# EAGLE board openx3 (EAGLE 9.5.1)
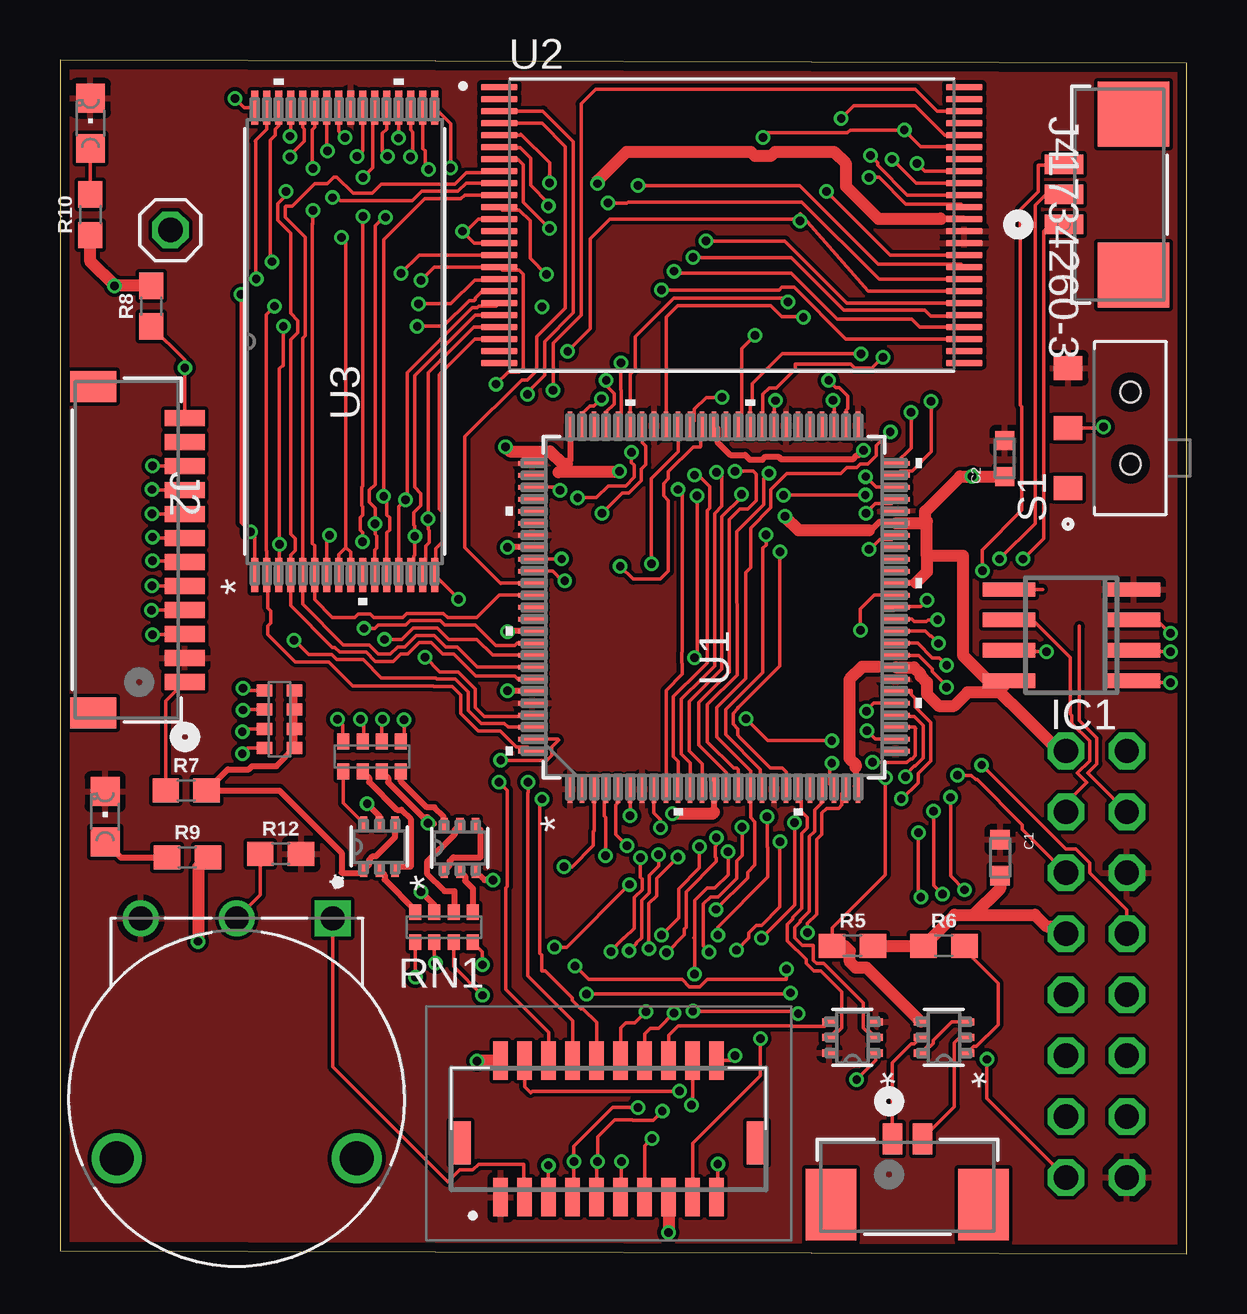
[diagram p0: board, top side]
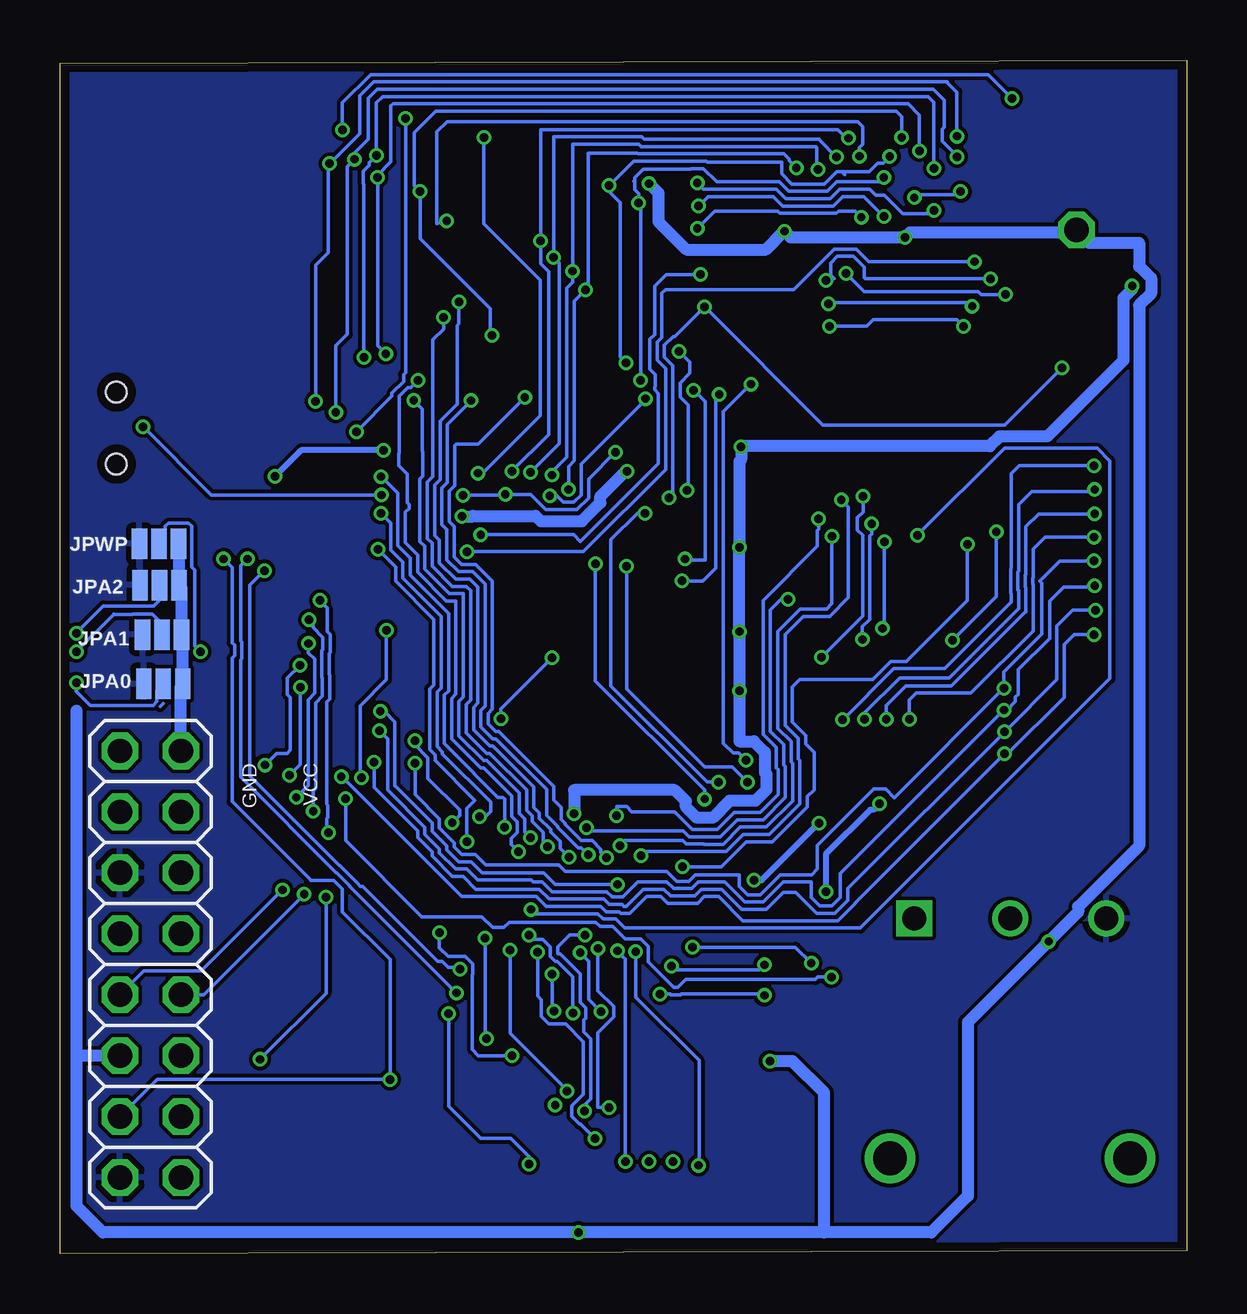
[diagram p1: board, bottom side, seen from below]

Size 46.95 x 49.76 mm. Coordinates in mm from the lower left corner, seen from the top.
Outline: 0,0.13 46.95,0 46.95,49.63 0,49.76 0,0.13
Copper layers (1*16): Top 0.035559375mm / dielectric 1.6mm / Bottom 0.035559375mm
Design rules "oshpark-2layer": minimum track width 6mil, minimum drill 10mil, track to track 6mil, track to pad 6mil, pad to pad 6mil, via to via 6mil, smd to smd 6mil, copper to edge 15mil, drill to drill 6mil, minimum pad ring 5mil, minimum via ring 5mil, stop-mask expansion 2.5mil, vias tented up to drill 0mil, thermal gap 10mil

## Footprints (pad centres in the part's own frame; a part is rotated, then mirrored left to right if it is on the bottom)
WCAP-CSGP_0603_REFLOW = smd 0.8 x 0.8: 1 -0.75,0; 2 0.75,0
SO-08 = smd 0.6 x 2.2: 1 -1.905,-2.6; 2 -0.635,-2.6; 3 0.635,-2.6; 4 1.905,-2.6; 5 1.905,2.6; 6 0.635,2.6; 7 -0.635,2.6; 8 -1.905,2.6
BM20BSRDSGTFLFSN = smd 0.6 x 1.6: 1 -4.5,-2.85; 2 -4.5,2.85; 3 -3.5,-2.85; 4 -3.5,2.85; 5 -2.5,-2.85; 6 -2.5,2.85; 7 -1.5,-2.85; 8 -1.5,2.85; 9 -0.5,-2.85; 10 -0.5,2.85; 11 0.5,-2.85; 12 0.5,2.85; 13 1.5,-2.85; 14 1.5,2.85; 15 2.5,-2.85; 16 2.5,2.85; 17 3.5,-2.85; 18 3.5,2.85; 19 4.5,-2.85; 20 4.5,2.85 | smd 0.85 x 1.8: 21 -6.175,-0.58; 22 6.175,-0.58
CONN_SM12B-SRSS-TB(LF)(SN) = smd 0.66 x 1.651: 1 5.5,-2.421; 2 4.5,-2.421; 3 3.5,-2.421; 4 2.5,-2.421; 5 1.5,-2.421; 6 0.5,-2.421; 7 -0.5,-2.421; 8 -1.5,-2.421; 9 -2.5,-2.421; 10 -3.5,-2.421; 11 -4.5,-2.421; 12 -5.5,-2.421 | smd 1.295 x 1.905: 13 -6.8,-6.236; 14 6.8,-6.236
CON00327_2 = smd 0.813 x 1.295: 1 -0.625,2.001; 2 0.625,2.001 | smd 2.108 x 2.997: 3 -3.175,-0.746; 4 3.175,-0.746
CON3_1X3_DRM125_HPI = smd 0.813 x 1.6: 1 1.25,0; 2 0,0; 3 -1.25,0 | smd 2.718 x 2.997: 4 -3.353,2.896; 5 3.353,2.896
2X08 = drill 1.016 octagon: 1 -8.89,-1.27; 2 -8.89,1.27; 3 -6.35,-1.27; 4 -6.35,1.27; 5 -3.81,-1.27; 6 -3.81,1.27; 7 -1.27,-1.27; 8 -1.27,1.27; 9 1.27,-1.27; 10 1.27,1.27; 11 3.81,-1.27; 12 3.81,1.27; 13 6.35,-1.27; 14 6.35,1.27; 15 8.89,-1.27; 16 8.89,1.27
1X01 = drill 1.016 octagon: 1 0,0
SMT-JUMPER_3_NO_NO-SILK = smd 0.635 x 1.27: 1 -0.813,0; 2 0,0; 3 0.813,0
CHIPLED_0805 = smd 1.2 x 1.2: A 0,-1.05; C 0,1.05
TRANS_UM6J1-L = smd 0.584 x 0.305: 1 -0.965,0.65; 2 -0.965,0; 3 -0.965,-0.65; 4 0.965,-0.65; 5 0.965,0; 6 0.965,0.65
0603 = smd 1.1 x 1: 1 -0.85,0; 2 0.85,0
TRIM_RV100F-30-4K1B-B10K-B301 = drill 1 square: 1 -4,-7.5 | drill 1: 2 0,-7.5; 3 4,-7.5 | drill 1.4: S1 -5,2.5; S2 5,2.5
0603-ARV = smd 0.5 x 0.65: 1 -1.2,-0.625; 2 -0.4,-0.625; 3 0.4,-0.625; 4 1.2,-0.625; 5 1.2,0.625; 6 0.4,0.625; 7 -0.4,0.625; 8 -1.2,0.625
SW_AYZ0102AGRLC = smd 1 x 1.2: 1 -2.5,2.45; 2 0,2.45; 3 2.5,2.45 | hole 0.85: -1.5,-0.15; 1.5,-0.15
TQFP100-L = smd 1.156 x 0.178: 1 -7.576,6; 2 -7.576,5.5; 3 -7.576,5; 4 -7.576,4.5; 5 -7.576,4; 6 -7.576,3.5; 7 -7.576,3; 8 -7.576,2.5; 9 -7.576,2; 10 -7.576,1.5; 11 -7.576,1; 12 -7.576,0.5; 13 -7.576,0; 14 -7.576,-0.5; 15 -7.576,-1; 16 -7.576,-1.5; 17 -7.576,-2; 18 -7.576,-2.5; 19 -7.576,-3; 20 -7.576,-3.5; 21 -7.576,-4; 22 -7.576,-4.5; 23 -7.576,-5; 24 -7.576,-5.5; 25 -7.576,-6; 51 7.576,-6; 52 7.576,-5.5; 53 7.576,-5; 54 7.576,-4.5; 55 7.576,-4; 56 7.576,-3.5; 57 7.576,-3; 58 7.576,-2.5; 59 7.576,-2; 60 7.576,-1.5; 61 7.576,-1; 62 7.576,-0.5; 63 7.576,0; 64 7.576,0.5; 65 7.576,1; 66 7.576,1.5; 67 7.576,2; 68 7.576,2.5; 69 7.576,3; 70 7.576,3.5; 71 7.576,4; 72 7.576,4.5; 73 7.576,5; 74 7.576,5.5; 75 7.576,6 | smd 0.178 x 1.156: 26 -6,-7.576; 27 -5.5,-7.576; 28 -5,-7.576; 29 -4.5,-7.576; 30 -4,-7.576; 31 -3.5,-7.576; 32 -3,-7.576; 33 -2.5,-7.576; 34 -2,-7.576; 35 -1.5,-7.576; 36 -1,-7.576; 37 -0.5,-7.576; 38 0,-7.576; 39 0.5,-7.576; 40 1,-7.576; 41 1.5,-7.576; 42 2,-7.576; 43 2.5,-7.576; 44 3,-7.576; 45 3.5,-7.576; 46 4,-7.576; 47 4.5,-7.576; 48 5,-7.576; 49 5.5,-7.576; 50 6,-7.576; 76 6,7.576; 77 5.5,7.576; 78 5,7.576; 79 4.5,7.576; 80 4,7.576; 81 3.5,7.576; 82 3,7.576; 83 2.5,7.576; 84 2,7.576; 85 1.5,7.576; 86 1,7.576; 87 0.5,7.576; 88 0,7.576; 89 -0.5,7.576; 90 -1,7.576; 91 -1.5,7.576; 92 -2,7.576; 93 -2.5,7.576; 94 -3,7.576; 95 -3.5,7.576; 96 -4,7.576; 97 -4.5,7.576; 98 -5,7.576; 99 -5.5,7.576; 100 -6,7.576
SOP50P2000X120-48N = smd 1.54 x 0.28: 1 -9.69,5.75; 2 -9.69,5.25; 3 -9.69,4.75; 4 -9.69,4.25; 5 -9.69,3.75; 6 -9.69,3.25; 7 -9.69,2.75; 8 -9.69,2.25; 9 -9.69,1.75; 10 -9.69,1.25; 11 -9.69,0.75; 12 -9.69,0.25; 13 -9.69,-0.25; 14 -9.69,-0.75; 15 -9.69,-1.25; 16 -9.69,-1.75; 17 -9.69,-2.25; 18 -9.69,-2.75; 19 -9.69,-3.25; 20 -9.69,-3.75; 21 -9.69,-4.25; 22 -9.69,-4.75; 23 -9.69,-5.25; 24 -9.69,-5.75; 25 9.69,-5.75; 26 9.69,-5.25; 27 9.69,-4.75; 28 9.69,-4.25; 29 9.69,-3.75; 30 9.69,-3.25; 31 9.69,-2.75; 32 9.69,-2.25; 33 9.69,-1.75; 34 9.69,-1.25; 35 9.69,-0.75; 36 9.69,-0.25; 37 9.69,0.25; 38 9.69,0.75; 39 9.69,1.25; 40 9.69,1.75; 41 9.69,2.25; 42 9.69,2.75; 43 9.69,3.25; 44 9.69,3.75; 45 9.69,4.25; 46 9.69,4.75; 47 9.69,5.25; 48 9.69,5.75
TS032 = smd 1.422 x 0.279: 1 -9.741,3.75; 2 -9.741,3.25; 3 -9.741,2.75; 4 -9.741,2.25; 5 -9.741,1.75; 6 -9.741,1.25; 7 -9.741,0.75; 8 -9.741,0.25; 9 -9.741,-0.25; 10 -9.741,-0.75; 11 -9.741,-1.25; 12 -9.741,-1.75; 13 -9.741,-2.25; 14 -9.741,-2.75; 15 -9.741,-3.25; 16 -9.741,-3.75; 17 9.741,-3.75; 18 9.741,-3.25; 19 9.741,-2.75; 20 9.741,-2.25; 21 9.741,-1.75; 22 9.741,-1.25; 23 9.741,-0.75; 24 9.741,-0.25; 25 9.741,0.25; 26 9.741,0.75; 27 9.741,1.25; 28 9.741,1.75; 29 9.741,2.25; 30 9.741,2.75; 31 9.741,3.25; 32 9.741,3.75

## Placement (x,y rotation side)
C1  [WCAP-CSGP_0603_REFLOW]  39.17,16.51 270 top
C2  [WCAP-CSGP_0603_REFLOW]  39.37,33.15 90 top
IC1  24AA256SN  [SO-08]  42.14,25.78 90 top
J1  BM20B-SRDS-G-TF(LF)(SN)  [BM20BSRDSGTFLFSN]  22.86,5.21 0 top
J2  SM12B-SRSS-TB(LF)(SN)  [CONN_SM12B-SRSS-TB(LF)(SN)]  7.62,29.34 270 top
J3  53398-0271  [CON00327_2]  35.31,2.79 0 top
J4  1734260-3  [CON3_1X3_DRM125_HPI]  41.83,44.15 270 top
JP1  [2X08]  43.18,12.06 90 bottom
JP2  [1X01]  4.6,42.67 0 top
JPA0  JUMPER-SMT_3_NO_NO-SILK  [SMT-JUMPER_3_NO_NO-SILK]  42.65,23.75 0 bottom
JPA1  JUMPER-SMT_3_NO_NO-SILK  [SMT-JUMPER_3_NO_NO-SILK]  42.7,25.81 0 bottom
JPA2  JUMPER-SMT_3_NO_NO-SILK  [SMT-JUMPER_3_NO_NO-SILK]  42.8,27.86 0 bottom
JPWP  JUMPER-SMT_3_NO_NO-SILK  [SMT-JUMPER_3_NO_NO-SILK]  42.82,29.59 0 bottom
LED1  [CHIPLED_0805]  1.27,47.12 0 top
LED2  [CHIPLED_0805]  1.88,18.21 0 top
R1  UM6K31NFHATCNTRANS_UM6J1-L  [TRANS_UM6J1-L]  36.83,9.02 180 top
R2  UM6K31NFHATCNTRANS_UM6J1-L  [TRANS_UM6J1-L]  33.02,9.02 180 top
R3  UM6K31NFHATCNTRANS_UM6J1-L  [TRANS_UM6J1-L]  16.66,16.92 90 top
R4  UM6K31NFHATCNTRANS_UM6J1-L  [TRANS_UM6J1-L]  13.31,16.97 90 top
R5  10k  [0603]  33.02,12.83 0 top
R6  10k  [0603]  36.83,12.83 0 top
R7  0  [0603]  5.26,19.3 0 top
R8  10k  [0603]  3.81,39.5 90 top
R9  200  [0603]  5.31,16.51 0 top
R10  200  [0603]  1.27,43.31 90 top
R11  RV100F-30-4K1B-B10K-B301  [TRIM_RV100F-30-4K1B-B10K-B301]  7.37,6.48 180 top
R12  4.7k  [0603]  9.19,16.66 0 top
RN1  10k  [0603-ARV]  16,13.61 0 top
RN2  10k  [0603-ARV]  9.14,22.28 90 top
RN3  100  [0603-ARV]  13,20.73 0 top
S1  AYZ0102AGRLC  [SW_AYZ0102AGRLC]  44.45,34.42 90 top
U1  LC4256V-75TN100CTQFP100-L  [TQFP100-L]  27.25,26.95 90 top
U2  AM29F016D-70EF  [SOP50P2000X120-48N]  27.99,42.88 0 top
U3  AM29F002BB90EI  [TS032]  11.86,38.02 90 top

## Library data of the parts
C1 C2 = Wurth_Elektronik_Passive_Capacitors_rev18b
IC1 = microchip; MPN: 24AA256T-I/SM; OC_FARNELL: 1579570; OC_NEWARK: 08N6838
J1 = BM20B-SRDS-G-TFLFSN; DESCRIPTION: JST SHD, 1mm Pitch, 20 Way, Right Angle PCB Header, Surface Mount; HEIGHT: 5.5mm; MANUFACTURER_NAME: JST (JAPAN SOLDERLESS TERMINALS); MANUFACTURER_PART_NUMBER: BM20B-SRDS-G-TF(LF)(SN)
J2 = SM12B-SRSS-TB; BUILT_BY: EMA_Cory; COPYRIGHT: Copyright (C) 2018 Accelerated Designs. All rights reserved; MANUFACTURER_PART_NUMBER: SM12B-SRSS-TB(LF)(SN); VENDOR: JST
J3 = Molex 2 pos 53398-0271; BUILT_BY: EMA_Don; COPYRIGHT: Copyright (C) 2016 Accelerated Designs. All rights reserved; MANUFACTURER_PART_NUMBER: 53398-0271; VENDOR: Molex Connector Corporation
J4 = TE 3 pos 1734260-3; BUILT_BY: EMA_UL_Team; MANUFACTURER_PART_NUMBER: 1734260-3; VENDOR: TE Connectivity
JP1 JP2 = pinhead
JPA0 JPA1 JPA2 JPWP = SparkFun-Jumpers
LED1 LED2 = adafruit
R1-R4 = UM6K31NFHA; BUILT_BY: EMA_Matt; COPYRIGHT: Copyright (C) 2018 Accelerated Designs. All rights reserved; MANUFACTURER_PART_NUMBER: UM6K31NFHATCN; VENDOR: ROHM Semiconductor
R5 R6 R8 = SparkFun-Resistors; PROD_ID: RES-00824
R7 = SparkFun-Resistors; PROD_ID: RES-08609
R9 R10 = SparkFun-Resistors; PROD_ID: RES-08220
R11 = RV100F-30-4K1B-B10K-B301; AVAILABILITY: Unavailable; DESCRIPTION: Thumbwheel Potentiometers 10mm Linear 10K PC Mount; MF: Alpha Taiwan; MP: RV100F-30-4K1B-B10K-B301; PACKAGE: None; PRICE: None
R12 = SparkFun-Resistors; PROD_ID: RES-07857
RN1-RN3 = resistor-dil; OC_FARNELL: unknown; OC_NEWARK: unknown
S1 = AYZ0102AGRLC; AVAILABILITY: Unavailable; DESCRIPTION: Slide Switch SPDT Surface Mount, Right Angle; MF: C&K; MP: AYZ0102AGRLC; PACKAGE: None; PRICE: None
U1 = LC4256V-75VTN100C; BUILT_BY: EMA_UL_Team; MANUFACTURER_PART_NUMBER: LC4256V-75TN100C; VENDOR: Lattice
U2 = AM29F016D-70EF; AVAILABILITY: Unavailable; DESCRIPTION: NOR Flash Parallel 5V 16M-bit 2M x 8 70ns 48-Pin TSOP; MF: Spansion; MP: AM29F016D-70EF; PACKAGE: TSOP-48 Spansion; PRICE: None
U3 = AM29F002BB-90EI; BUILT_BY: EMA_UL_Team; MANUFACTURER_PART_NUMBER: AM29F002BB90EI; VENDOR: Spansion

## Nets
+3V3: C1.2 C2.1 IC1.8 JP1.9 JP1.15 JPA0.3 JPA1.3 JPA2.3 JPWP.3 R5.2 R6.1 R8.2 R10.1 U1.13 U1.25 U1.33 U1.40 U1.45 U1.63 U1.75 U1.83 U1.90 U1.95
+5V: J1.2 J1.15 JP1.6 JP2.1 R9.2 U2.12 U2.14 U2.37 U3.8 U3.9
A0: U1.14 U2.30 U3.20
A1: U1.11 U2.29 U3.19
A2: U1.10 U2.28 U3.18
A3: U1.9 U2.27 U3.17
A4: U1.8 U2.22 U3.16
A5: U1.6 U2.21 U3.15
A6: U1.5 U2.20 U3.14
A7: U1.4 U2.19 U3.13
A8: U1.3 U2.18 U3.3
A9: U1.100 U2.17 U3.2
A10: U1.99 U2.16 U3.31
A11: U1.98 U2.15 U3.1
A12: U1.97 U2.10 U3.12
A13: U1.94 U2.9 U3.4
A14: U1.93 U2.8 U3.5
A15: U1.92 U2.7 U3.11
A16: U1.91 U2.6 U3.10
A17: U1.87 U2.5 U3.6
A18: U1.86 U2.4
A19: U1.85 U2.3
A20: U1.84 U2.46
BLUELED: J2.8 RN3.7
BUFLCE#: U1.19 U3.30
D0: J4.1 JP1.4 R2.1
DB0: J1.7 U1.70
DB1: J1.8 U1.69
DB2: J1.9 U1.67
DB3: J1.10 U1.66
DB4: J1.11 U1.58
DB5: J1.12 U1.53
DB6: J1.13 U1.48
DB7: J1.14 U1.47
DQ0: U1.78 U2.31 U3.21
DQ1: U1.72 U2.32 U3.22
DQ2: U1.71 U2.33 U3.23
DQ3: U1.61 U2.34 U3.25
DQ4: U1.60 U2.38 U3.26
DQ5: U1.59 U2.39 U3.27
DQ6: U1.50 U2.40 U3.28
DQ7: U1.49 U2.41 U3.29
E: J1.6 U1.64
EPA0: IC1.1 JPA0.2
EPA1: IC1.2 JPA1.2
EPA2: IC1.3 JPA2.2
EPWP: IC1.7 JPWP.2
EXTPROTSW: J2.12 R8.1 S1.2 U1.12
FPEJECT: J3.1 R1.5
FPPWR: J3.2 R1.2
GND: C1.1 C2.2 IC1.4 J1.1 J2.2 JP1.2 JP1.12 JPA0.1 JPA1.1 JPA2.1 JPWP.1 LED1.C LED2.C R2.3 R2.6 R11.3 R12.2 S1.3 U1.1 U1.7 U1.18 U1.26 U1.32 U1.46 U1.51 U1.57 U1.68 U1.76 U1.82 U1.96 U2.35 U2.36 U3.24
HDDACT: J4.2 RN1.3
HDDLED: J2.9 RN3.6
K: J1.16 R2.4
LAD0: JP1.11 U1.34
LAD1: JP1.10 U1.35
LAD2: JP1.8 U1.36
LAD3: JP1.7 U1.37
LANACT: J4.3 RN1.4
LANLED: J2.10 RN3.5
LCLK: JP1.1 U1.38
MNFLCE#: U1.17 U2.11
N$1: LED2.A R9.1
N$2: R3.2 RN1.5
N$3: R3.5 RN1.6
N$4: R3.1 R3.4 R4.1 R4.4 R7.2 RN2.1 RN2.2 RN2.3 RN2.4
N$5: LED1.A R10.2
N$6: R4.5 RN1.7
N$56: R1.3 R1.6
N$59: R1.4 R5.1 U1.39
N$61: R1.1 R6.2 U1.41
N$62: R2.2 U1.22
N$63: R2.5 U1.20
N$71: R4.2 RN1.8
N$72: R3.6 RN3.4
N$73: R3.3 RN3.3
N$74: R4.3 RN3.2
N$75: R4.6 RN3.1
N$78: RN1.1 U1.31
N$79: RN1.2 U1.30
N$87: J2.1 R7.1
OE#: U1.15 U2.43 U3.32
REDLED: J2.7 RN3.8
RS: J1.4 U1.44
RW: J1.5 U1.65
SCL: IC1.6 JP1.13
SDA: IC1.5 JP1.14
SWBANK1: J2.6 RN2.5 U1.23
SWBANK2: J2.5 RN2.6 U1.27
SWBANK3: J2.4 RN2.7 U1.28
SWBANK4: J2.3 RN2.8 U1.29
TCK: J1.20 U1.24
TDI: J1.18 U1.2
TDO: J1.17 U1.74
TMS: J1.19 U1.52
VO: J1.3 R11.1 R11.2 R12.1
WE#: U1.16 U2.44 U3.7

## Tracks (layer width: path | path; a pad name or v marks a point on that pad's centre or on a via)
+3V3  (via drill 0.35)
  Top 0.254: U1.45 34.78,30.5 34.14,30.5 33.8,30.16 33.71,30.16 | U1.13 27.25,18.84 27.25,18.83 27.25,18.41 | U1.83 18.65,29.45 v18.64,29.44 | U1.90 18.66,25.95 v18.64,25.93 | U1.95 18.66,23.45 v18.64,23.47 | U1.75 21.25,33.05 21.13,32.93 20.78,32.57 | U1.63 27.39,34.39 27.39,33.83 27.92,33.3 28.54,33.3 28.74,33.1 29.27,33.1 29.39,33.22 29.94,33.22 30.04,33.12 33.05,33.12 33.2,33.28 33.26,33.28 v33.48,33.49 | 35.66,27.96 34.85,27.96 U1.40 | 34.09,24.46 34.1,24.45 U1.33 35.58,24.44 | 33.15,20.27 33.15,19.48 U1.25 | 38.08,14.12 38.2,14.12
  Top 0.508: R5.2 R6.1 37.28,14.12 38.2,14.12 40.62,14.12 41.1,13.64 41.6,13.64 JP1.9 | C1.2 39.17,15.21 38.08,14.12 | 39.46,23.8 IC1.8 39.06,23.39 37.82,23.39 37.26,22.83 36.61,22.83 36.12,23.32 36.12,23.81 35.86,24.08 35.86,24.16 35.58,24.44 U1.33 | 36.12,29.07 36.12,30.53 36.04,30.45 | 36.04,30.45 36.04,30.94 37.5,32.4 v38,32.4 C2.1 | R8.2 v2.27,40.35 1.27,41.35 R10.1 | v18.57,33.63 18.75,33.45 20.43,33.45 20.94,32.93 21.13,32.93 | U1.45 36.04,30.45 | 27.25,18.41 27.18,18.34 v25.53,18.34 | v23.32,32.61 23.27,32.57 20.78,32.57 | 36.12,29.07 36.13,29.08 37.62,29.08 37.62,24.94 41.61,20.95 JP1.15 41.91,21.24 41.78,21.37 | 36.12,29.07 36.12,28.42 35.66,27.96 | 34.09,24.46 33.43,24.46 32.89,23.93 32.89,20.65 33.15,20.39 33.15,20.27 | 33.71,30.16 30.78,30.16 v30.2,30.73
  Bottom 0.254: v33.48,33.49 36.9,33.49 v38,32.4
  Bottom 0.508: v30.2,30.73 29.76,30.73 29.74,30.75 27.13,30.75 26.91,30.53 25.21,30.53 24.44,31.31 24.44,31.57 23.36,32.65 v23.32,32.61 | v25.53,18.34 25.53,19.33 21.34,19.33 20.87,18.86 20.87,18.63 20.41,18.17 19.76,18.17 19.05,18.88 17.97,18.88 17.51,19.33 17.51,19.98 17.58,20.05 17.58,20.89 18.04,21.35 18.64,21.35 v18.64,23.47 v18.64,25.93 18.67,25.96 18.67,29.41 v18.64,29.44 18.64,33.02 18.57,33.1 v18.57,33.63 18.54,33.66 8.2,33.66 7.79,34.06 5.82,34.06 2.64,37.24 2.64,39.84 2.27,40.2 v2.27,40.35 | JPWP.3 41.99,29.57 JPA2.3 41.89,27.76 JPA1.3 41.83,25.76 JPA0.3 41.91,23.67 JP1.15
+5V  (via drill 0.35)
  Top 0.152: U2.12 17.44,43.12 16.93,42.62 v16.76,42.62 17.26,42.12 U2.14 | v11.73,42.37 11.91,42.19 11.91,29.44 | U3.9 12.11,29.24 11.91,29.44 | U3.8 11.61,29 11.61,29.01 11.61,29.13 11.91,29.44
  Top 0.254: U2.37 37.66,43.15 36.69,43.15
  Top 0.508: 36.69,43.15 36.72,43.12 34.11,43.12 32.75,44.48 32.75,45.43 32.26,45.92 29.79,45.92 29.61,45.75 28.96,45.75 28.79,45.92 23.6,45.92 22.4,44.73 v22.4,44.6 | J1.15 25.36,0.9 v25.35,0.89 | v17.37,8.03 17.4,8.06 J1.2 | R9.2 5.75,16.1 v5.75,13.02
  Bottom 0.508: v22.4,44.6 22.02,44.22 22.02,43.03 20.85,41.86 17.53,41.86 v16.76,42.62 16.51,42.37 v11.73,42.37 11.53,42.57 4.7,42.57 JP2.1 4.06,42.14 1.98,42.14 1.98,41.16 1.49,40.67 1.49,40.02 1.98,39.53 1.98,17 4.53,14.46 4.53,14.24 v5.75,13.02 9.12,9.65 9.12,2.41 10.64,0.89 15.11,0.89 | 15.11,0.89 v25.35,0.89 45.16,0.89 46.25,1.98 46.25,8.25 | 46.25,8.25 46.25,22.63 | JP1.6 46.25,8.25 | 15.11,0.89 15.11,6.71 16.43,8.03 v17.37,8.03
A0  (via drill 0.35)
  Top 0.152: U3.20 14.11,46.51 v14.1,46.5 | U2.30 32.79,39.62 30.2,42.21 v26.92,42.21 | v28.12,32.61 28.88,32.61 29,32.49 29,31.4 28.65,31.04 28.32,31.04 27.89,30.6 27.89,24.24 26.61,22.97 26.61,21.2 27.75,20.06 U1.14
  Bottom 0.152: v14.1,46.5 14.18,46.5 14.54,46.86 26.92,46.86 v26.92,42.21 26.92,41.27 26.59,40.95 26.59,34.14 v28.12,32.61
A1  (via drill 0.35)
  Top 0.152: U3.19 14.61,46.84 14.71,46.75 14.71,45.82 v14.6,45.71 | v26.38,41.52 30.46,41.52 32.66,39.32 36.04,39.32 36.27,39.09 37.65,39.09 U2.29 | v27.35,32.56 27.52,32.73 27.58,32.66 27.58,31.16 27.28,30.86 27.28,24.49 26.79,24.01 26.77,24.01 25.88,23.11 25.88,20.83 26.25,20.46 U1.11
  Bottom 0.152: v14.6,45.71 15.32,46.43 15.32,46.46 22.61,46.46 22.71,46.55 26.38,46.55 v26.38,41.52 26.15,41.29 26.15,33.76 v27.35,32.56
A2  (via drill 0.35)
  Top 0.152: U3.18 15.11,46.06 15.21,45.97 15.21,45.34 v15.36,45.19 | v25.59,40.95 25.59,40.9 25.61,40.88 30.47,40.88 32.38,38.96 35.48,38.96 35.82,38.62 U2.28 | v26.44,32.46 26.59,32.46 27.07,31.98 27.07,31.08 26.97,30.98 26.97,24.62 26.66,24.31 26.65,24.31 25.56,23.22 25.56,20.72 25.75,20.52 U1.10
  Bottom 0.152: v15.36,45.19 15.42,45.24 15.42,46.1 15.47,46.15 22.74,46.15 22.84,46.25 25.59,46.25 v25.59,40.95 25.59,40.5 25.84,40.25 25.84,33.2 26.44,32.61 v26.44,32.46
A3  (via drill 0.35)
  Top 0.152: U3.17 16.27,47.1 v16.27,45.26 | U2.27 32.74,38.12 30.58,40.28 30.08,40.28 29.97,40.17 v25.06,40.17 | U1.9 25.25,23.48 25.93,24.15 25.93,24.6 25.91,24.62 25.91,25.06 25.93,25.08 25.93,31.77 25.86,31.85 v25.76,31.85
  Bottom 0.152: v16.27,45.26 16.57,45.56 16.57,45.62 16.8,45.85 22.86,45.85 22.89,45.87 24.94,45.87 24.94,40.29 v25.06,40.17 25.52,39.71 25.52,33.05 25.76,32.82 v25.76,31.85
A4  (via drill 0.35)
  Top 0.152: U2.22 17.27,38.12 15.8,36.65 15.8,31.03 15.95,30.88 15.95,29.69 15.65,29.39 15.65,28.32 U3.16 v16.61,27.28 | U1.8 24.74,19.36 24.74,18.38 25.02,18.1 v25.02,17.75
  Bottom 0.152: v16.61,27.28 16.89,27.28 17.35,26.82 17.35,21.78 16.79,21.22 16.79,20.38 16.73,20.31 16.73,19.01 17.65,18.09 18.73,18.09 19.44,17.37 19.99,17.37 20,17.38 20.74,17.38 20.98,17.63 24.89,17.63 v25.02,17.75
A5  (via drill 0.35)
  Top 0.152: U3.15 15.24,28.41 15.24,29.5 15.39,29.64 15.39,30.15 15.34,30.19 v15.34,30.63 15.34,36.73 17.24,38.62 U2.21 | v23.75,18.25 U1.6
  Bottom 0.152: v15.34,30.63 15.34,30.19 15.39,30.15 15.39,29.49 17.65,27.23 17.65,21.65 17.1,21.09 17.1,20.25 17.03,20.18 17.03,19.13 17.77,18.39 18.86,18.39 19.56,17.69 20.61,17.69 | 19.86,17.68 19.86,17.69 20.61,17.69 | 21.34,18.41 20.61,17.69 | 21.34,18.41 22.94,18.41 | 20.61,17.69 21.34,18.41 | 21.34,18.41 23.12,18.41 23.34,18.64 23.75,18.64 v23.75,18.26 v23.75,18.25
A6  (via drill 0.35)
  Top 0.152: U3.14 14.74,28.41 14.74,29.09 14.78,29.13 v14.78,29.9 14.78,30.33 14.73,30.38 14.73,30.88 15.04,31.19 15.04,31.69 14.78,31.95 14.78,36.6 17.31,39.12 U2.20 | U1.5 23.25,18.81 23.15,18.71 23.15,17.48 v23.62,17.01
  Bottom 0.152: v14.78,29.9 14.78,27.1 15.01,26.87 16.1,26.87 17.04,25.93 17.04,21.9 16.49,21.35 16.49,20.5 16.42,20.44 16.42,18.88 17.52,17.78 18.6,17.78 19.32,17.07 20.11,17.07 20.12,17.08 20.86,17.08 21,17.22 23.41,17.22 v23.62,17.01
A7  (via drill 0.35)
  Top 0.152: U2.19 18.17,39.49 17.46,39.49 17.39,39.43 17.18,39.43 14.48,36.73 14.48,31.51 v14.4,31.42 14.11,31.14 U3.13 | v22.73,16.59 22.73,18.19 22.68,18.24 22.68,19.3 U1.4
  Bottom 0.152: v22.73,16.59 22.55,16.77 20.25,16.77 20.24,16.76 19.19,16.76 18.48,17.48 17.39,17.48 16.12,18.76 16.12,20.56 16.18,20.63 16.18,21.47 16.74,22.03 16.74,25.81 15.98,26.57 14.88,26.57 14.1,27.36 14.1,31.13 v14.4,31.42
A8  (via drill 0.35)
  Top 0.152: U3.3 9.14,28.31 v9.14,29.57 9.14,36.89 9.28,37.03 9.3,37.03 v9.3,38.65 | U2.18 17.59,40.12 17.3,39.84 17.3,39.77 17.27,39.73 17.05,39.73 15.98,38.66 v14.88,38.66 | U1.3 22.25,17.63 22.23,17.6 22.23,17.02 21.34,16.13 v21.01,16.13
  Bottom 0.152: v9.3,38.65 9.58,38.93 13.06,38.93 13.33,38.66 v14.88,38.66 | v9.14,29.57 9.14,27.23 11.68,24.69 12.33,24.69 13.09,23.93 16.13,23.93 16.43,23.62 16.43,22.15 15.88,21.6 15.88,21.24 15.53,20.89 15.53,19.34 15.81,19.06 15.81,18.63 17.27,17.17 18.35,17.17 19.39,16.13 v21.01,16.13
A9  (via drill 0.35)
  Top 0.152: U1.100 19.5,21.13 19.01,21.13 18.34,21.79 17.43,21.79 16.7,22.52 16.7,23.29 16.34,23.64 15.57,23.64 15.55,23.67 12.2,23.67 11.21,24.67 9.81,24.67 8.66,25.81 8.66,26.17 8.79,26.29 8.79,26.79 8.66,26.92 8.66,28.23 U3.2 8.61,29.29 8.59,29.31 8.59,39.14 v8.94,39.5 | U2.17 18.27,40.59 17.27,40.59 16.28,39.6 v14.93,39.6
  Bottom 0.152: v8.94,39.5 9.09,39.65 14.88,39.65 v14.93,39.6
A10  (via drill 0.35)
  Top 0.152: U3.31 8.61,46.86 8.15,46.41 | 8.15,46.41 8.13,46.38 | 8.15,46.41 8.15,40.66 v8.18,40.64 | v8.18,40.64 8.2,40.62 v8.18,40.64 | v15.04,40.56 15.6,41.12 U2.16 18.43,40.99 19.14,40.99 19.3,40.84 19.3,36.91 19.14,36.76 18.67,36.76 v18.16,36.25 | v18.36,20.57 20.29,20.57 20.48,20.77 20.48,21.12 20.78,21.41 20.74,21.45 U1.99
  Bottom 0.152: v15.04,40.56 14.96,40.64 14.69,40.64 14.84,40.79 14.84,41.29 14.56,41.57 13.9,41.57 13.44,41.12 13.44,40.69 13.4,40.64 v8.18,40.64 | v18.16,36.25 19.3,35.1 19.3,21.27 18.89,20.86 18.66,20.86 v18.36,20.57
A11  (via drill 0.35)
  Top 0.152: U2.15 14.96,41.62 v14.2,40.86 | v7.55,39.98 7.55,30.47 v7.94,30.09 8.11,29.91 U3.1 8.18,28.22 | v9.75,25.58 10.36,24.97 11.33,24.97 11.53,24.77 12.63,24.77 13.4,24 15.65,24 15.7,23.95 16.47,23.95 17,23.41 17,22.65 17.55,22.1 18.52,22.1 18.67,21.95 U1.98
  Bottom 0.152: v7.55,39.98 8.57,39.98 8.69,40.1 13.44,40.1 v14.2,40.86 | v7.94,30.09 7.94,27.39 v9.75,25.58
A12  (via drill 0.35)
  Top 0.152: U2.10 16.85,44.12 16.7,43.97 15.2,43.97 13.49,42.27 v13.49,31.57 | U3.12 13.61,30.05 13.73,30.17 13.73,30.67 13.62,30.79 13.62,31.57 v13.49,31.57 | v13.49,31.57 | v15.21,24.87 15.83,24.25 16.6,24.25 17.31,23.54 17.31,22.77 17.68,22.4 19.63,22.4 U1.97
  Bottom 0.152: v13.49,31.57 13.49,30.92 13.73,30.67 13.73,30.17 13.51,29.95 13.51,26.57 v15.21,24.87
A13  (via drill 0.35)
  Top 0.152: U1.94 19.1,23.95 19.09,23.94 18.95,24.08 17.33,24.08 16.42,24.99 15.95,24.99 15.47,25.47 14.96,25.47 14.48,24.99 14.19,24.99 13.89,24.69 13.13,24.69 12.75,25.07 11.66,25.07 11.46,25.27 11.35,25.27 9.61,27.01 U3.4 9.61,29.12 9.8,29.31 9.8,29.82 9.61,30.01 9.61,38.1 9.91,38.4 9.91,38.9 9.61,39.2 9.61,42.54 9.07,43.08 9.07,43.76 9.42,44.12 v9.42,44.27 | v11.35,44.02 11.56,44.02 11.68,43.89 14.68,43.89 15.07,44.28 16.58,44.28 16.92,44.62 U2.9
  Bottom 0.152: v11.35,44.02 11.23,44.14 9.55,44.14 v9.42,44.27
A14
  Top 0.152: U2.8 18.23,45.06 16.93,45.06 16.45,44.58 13.39,44.58 13,44.2 12.22,44.2 11.54,44.88 11.41,44.88 11.13,44.6 10.61,44.6 9.67,43.66 9.4,43.66 9.38,43.64 9.38,43.21 10.22,42.37 10.22,38.27 10.11,38.17 U3.5 10.11,27.07 11.81,25.38 12.88,25.38 13.26,25 13.76,25 14.07,25.3 14.36,25.3 14.84,25.78 15.59,25.78 16.07,25.3 16.54,25.3 17.39,24.45 U1.93
A15  (via drill 0.35)
  Top 0.152: U1.92 18.03,24.95 17.37,25.6 16.2,25.6 15.72,26.08 14.71,26.08 14.23,25.6 v13.51,25.6 | U3.11 13.11,29.32 13.21,29.42 13.21,29.92 13.13,30 v13.13,30.42 13.13,31.07 12.88,31.32 12.88,31.82 13.13,32.07 13.13,42.84 13.49,43.2 v13.56,43.2 | v20.4,42.73 19.31,43.82 19.31,45.39 19.1,45.59 18.33,45.59 U2.7
  Bottom 0.152: v13.13,30.42 13.13,30 13.21,29.92 13.21,26.44 13.51,26.14 v13.51,25.6 | v13.56,43.2 13.82,43.46 14.51,43.46 14.61,43.37 16.96,43.37 17.05,43.46 19.67,43.46 v20.4,42.73
A16  (via drill 0.35)
  Top 0.152: U2.6 18.32,46.1 19.18,46.1 19.61,45.67 19.61,44.53 20.34,43.8 v20.34,43.67 | v12.6,29.67 12.62,29.69 12.62,30.07 12.52,30.17 12.52,30.67 12.62,30.78 12.62,31.15 12.58,31.19 12.58,31.95 12.62,32 v12.62,43.23 | U1.91 19.04,25.45 18.95,25.35 18.16,25.35 17.3,26.21 16.02,26.21 15.84,26.39 14.58,26.39 14.41,26.21 13.26,26.21 13.11,26.06 v12.67,26.06
  Bottom 0.152: v12.6,29.67 12.6,26.14 v12.67,26.06 | v12.62,43.23 13.46,44.07 14.33,44.07 14.73,43.67 16.83,43.67 17.23,44.07 19.95,44.07 v20.34,43.67
A17  (via drill 0.35)
  Top 0.152: U2.5 19.17,46.62 19.2,46.66 20.4,45.47 v20.4,44.63 | U1.87 18.3,27.45 17.37,26.52 16.15,26.52 15.97,26.69 14.46,26.69 14.28,26.52 13.08,26.52 12.93,26.67 12.42,26.67 12.27,26.52 11.35,26.52 10.61,27.26 U3.6 10.62,29.51 10.52,29.61 10.52,42.93 10.54,42.91 v10.54,43.48
  Bottom 0.152: v10.54,43.48 10.66,43.36 11.84,43.36 12.6,44.12 12.95,44.12 13.21,44.37 14.46,44.37 14.86,43.97 16.7,43.97 17.1,44.37 20.14,44.37 v20.4,44.63
A18
  Top 0.152: U2.4 20.09,47.12 21.06,46.15 21.06,39.42 19.86,38.23 19.86,36.8 19.48,36.42 19.23,36.42 16.87,34.06 16.87,29.44 18.36,27.94 18.37,27.95 U1.86
A19  (via drill 0.35)
  Top 0.152: U2.3 | U2.3 20.12,47.62 21.39,46.35 21.39,39.22 20.19,38.02 20.19,36.63 19.48,35.92 v19.48,35.81 | v21.03,28.05 20.92,28.05 20.52,28.45 U1.85
  Bottom 0.152: v19.48,35.81 19.63,35.66 19.63,28.57 20.16,28.05 v21.03,28.05
A20  (via drill 0.35)
  Top 0.152: U2.46 36.55,47.62 35.64,48.54 22.33,48.54 21.72,47.93 21.72,39.12 20.55,37.95 v20.55,35.99 | v20.9,28.96 U1.84
  Bottom 0.152: v20.55,35.99 20.07,35.51 20.07,28.9 20.85,28.9 v20.9,28.96
BLUELED  (via drill 0.35)
  Top 0.152: J2.8 v3.84,30.84 v3.83,30.84 | RN3.7 12.63,21.38 12.65,21.36 12.65,22.28 v12.52,22.28
  Bottom 0.152: v12.52,22.28 12.52,22.86 11.71,23.67 9.8,23.67 6.73,26.75 6.71,26.75 6.71,27.76 6.73,27.79 6.73,28.29 6.71,28.32 6.71,30.3 6.17,30.84 v3.83,30.84
BUFLCE#  (via drill 0.35)
  Top 0.152: U3.30 9.11,47.02 8.97,46.88 8.97,46.62 8.77,46.41 8.77,41.42 v8.84,41.35 | U1.19 30.25,20.09 30.1,20.24 29.59,20.24 28.32,21.51 28.25,21.63 28.25,21.88 28.04,22.08 28.04,22.52 28.25,22.72 28.25,22.76 30,24.51 v30,29.26
  Bottom 0.152: v30,29.26 25.15,29.26 21.72,32.69 21.72,36.89 22.07,37.24 22.07,37.99 21.87,38.19 21.87,40.03 21.72,40.18 16.38,40.18 14.68,41.88 13.78,41.88 13.25,41.35 v8.84,41.35
D0  (via drill 0.35)
  Top 0.152: J4.1 41.27,42.89 41,42.62 41,29.82 v40.13,28.96 | R2.1 33.99,8.05 v33.2,7.26
  Bottom 0.152: v40.13,28.96 39.78,28.6 39.78,25.46 39.68,25.37 39.68,24.93 39.78,24.83 39.78,18.85 36.52,15.59 | JP1.4 42.9,7.26 v33.2,7.26 33.2,12.27 35.18,14.25 35.18,15.21 35.54,15.57 36.5,15.57 36.52,15.59 | 36.52,15.59
DB0  (via drill 0.35)
  Top 0.152: U1.70 23.75,36.66 23.97,36.88 23.97,38.23 25.57,39.83 30.18,39.83 v30.33,39.67 | J1.7 21.41,2.41 v21.41,3.83 21.41,4.47 23.04,6.1 v24.08,6.1 | v25.74,16.52 24.86,15.65 24.86,14.92 24.54,14.59 v24.54,12.72
  Bottom 0.152: v30.33,39.67 30.33,38.76 30.4,38.69 30.4,35.41 31.11,34.7 31.11,32.27 31.34,32.04 31.34,29.94 31.14,29.74 31.14,28.79 30.47,28.12 29.88,28.12 29.54,27.78 29.54,22.95 29.71,22.77 29.71,21.83 29.05,21.16 28.91,21.16 27.2,19.45 27.2,18.6 26.98,18.38 26.98,18.15 26.51,17.68 26.51,17.58 26.11,17.19 26.11,16.9 v25.74,16.52 | 21.41,3.99 v21.41,3.83 | v24.08,6.1 24.54,6.1 24.54,9.21 23.88,9.86 23.88,10.3 24.54,10.96 v24.54,12.72
DB1  (via drill 0.35)
  Top 0.152: J1.8 21.36,9.7 19.48,11.59 19.48,19.2 19.51,19.23 v19.51,19.66 | U1.69 24.25,33.82 24.41,33.66 24.41,32.89 24.23,32.71 24.23,32.24 23.7,31.7 23.42,31.7 v22.58,30.86
  Bottom 0.152: v22.58,30.86 22.91,30.86 24,29.77 24,23.67 19.99,19.66 v19.51,19.66
DB2  (via drill 0.35)
  Top 0.152: U1.67 25.25,39.05 25.73,39.52 29.62,39.52 30.08,39.07 30.93,39.07 v30.97,39.03 | J1.9 22.36,3.79 v22.4,3.83 22.4,4.88 23.11,5.59 23.84,5.59 23.86,5.57 24.72,5.57 v25.09,5.94 | v26.64,16.97 26.64,16.08 25.78,15.22 25.78,14 v25.07,13.28
  Bottom 0.152: v30.97,39.03 30.97,38.55 31.42,38.1 31.42,32.39 31.65,32.16 31.65,29.82 31.44,29.61 31.44,28.66 30.6,27.82 30.02,27.82 29.84,27.64 29.84,23.07 30.02,22.9 30.02,21.7 29.17,20.86 29.04,20.86 27.51,19.33 27.51,18.48 27.28,18.25 27.28,18.02 26.81,17.56 26.81,17.14 v26.64,16.97 | v25.09,5.94 25.12,5.97 25.12,6.17 24.84,6.45 24.84,8.96 25.12,9.24 25.12,9.74 25.05,9.81 25.05,10.25 25.27,10.48 25.27,11.67 26.09,12.49 26.18,12.49 26.21,12.52 26.21,12.78 25.71,13.28 v25.07,13.28
DB3  (via drill 0.35)
  Top 0.152: J1.10 22.36,9.64 21.79,10.21 21.69,10.21 21.34,10.57 21.34,10.67 20.22,11.79 20.07,11.79 20.07,12.45 19.99,12.53 19.99,18.86 v20.09,18.95 | v24.64,28.75 24.64,32.31 25.75,33.42 U1.66
  Bottom 0.152: v20.09,18.95 20.09,19.32 24.64,23.88 v24.64,28.75 24.59,28.8
DB4  (via drill 0.35)
  Top 0.152: U1.58 29.75,35.42 29.82,35.48 v29.82,35.56 | v24.94,16.64 24.94,16.15 24.56,15.78 24.56,15.05 24.23,14.72 24.23,13.17 24.01,12.95 24.01,12.91 v23.72,12.62 | v23.39,3.83 23.39,2.39 J1.11
  Bottom 0.152: v29.82,35.56 30.81,34.57 30.81,32.14 31.04,31.91 31.04,30.39 30.83,30.18 30.83,28.91 30.34,28.42 29.75,28.42 29.23,27.91 29.23,22.82 29.41,22.65 29.41,21.95 28.92,21.47 28.79,21.47 26.67,19.35 26.67,18.28 26.2,17.81 26.2,17.76 25.36,16.92 25.22,16.92 v24.94,16.64 | v23.72,12.62 23.49,12.4 23.49,12.38 23.39,12.28 v23.39,3.83
DB5  (via drill 0.35)
  Top 0.152: U1.53 32.25,35.52 v32.21,35.56 | v24.41,10.08 23.95,9.63 23.57,9.63 23.36,9.42 J1.12 | v27.34,17.34 27.34,17.02 27.31,16.98 27.31,16.54 27.34,16.51 27.34,16.35 26.09,15.09 26.09,13.61 26.01,13.53 26.01,13.29 v25.27,12.55
  Bottom 0.152: v32.21,35.56 31.85,35.2 31.85,33.47 31.83,33.44 31.83,32.41 31.95,32.29 31.95,29.69 31.75,29.49 31.75,28.54 30.72,27.51 30.15,27.51 30.15,23.2 30.32,23.03 30.32,21.58 29.3,20.55 29.16,20.55 27.81,19.2 27.81,18.35 27.59,18.13 27.59,17.58 v27.34,17.34 | v25.27,12.55 24.92,12.19 24.92,10.59 v24.41,10.08
DB6  (via drill 0.35)
  Top 0.152: U1.48 34.01,31.95 v33.57,32.39 | v28.42,17.78 28.42,16.59 28.2,16.37 28.2,15.65 27.43,14.88 27.11,14.88 26.8,14.57 26.8,13.04 26.8,12.83 v27.05,12.57 | v24.66,4.8 24.36,4.5 J1.13
  Bottom 0.152: v33.57,32.39 32.87,31.7 32.87,29.52 32.36,29 32.36,28.28 30.76,26.69 30.76,23.45 30.93,23.28 30.93,21.27 30.71,21.05 30.71,21.04 28.7,19.02 28.5,19.02 28.42,18.95 v28.42,17.78 | v24.66,4.8 25.28,5.41 25.32,5.41 25.63,5.72 25.63,6.16 25.15,6.64 25.15,8.84 25.88,9.58 26.59,9.58 26.9,9.89 26.9,10.59 27.05,10.74 v27.05,12.57
DB7  (via drill 0.35)
  Top 0.152: U1.47 34.65,31.27 33.97,31.27 33.62,30.91 | 33.62,30.91 33.58,30.91 | 33.62,30.91 v33.58,30.87 | v27.41,13.28 v27.4,13.29 27.4,13.61 29.49,15.7 29.49,16.93 29.47,16.95 29.47,18.11 29.46,18.11 v29.46,18.21 | v25.58,10.03 24.94,9.4 24.59,9.4 24.36,9.17 J1.14
  Bottom 0.152: v33.58,30.87 33.18,30.46 33.18,29.34 32.66,28.83 32.66,28.16 31.06,26.56 31.06,23.58 31.24,23.4 31.24,21.14 31.02,20.92 31.02,20.83 29.01,18.82 29.01,18.44 29.23,18.21 v29.46,18.21 | v27.41,13.28 27.23,13.1 26.83,13.1 26.52,12.79 26.52,12.4 26.31,12.19 26.22,12.19 25.58,11.54 v25.58,10.03
DQ0  (via drill 0.35)
  Top 0.152: U3.21 13.61,46.88 13.43,46.7 13.43,45.95 v13.64,45.74 | U2.31 34.04,40.12 34.04,40.13 33.68,40.13 30.84,43.36 v30.84,43.05 30.76,43.13 22.91,43.13 22.1,42.32 22.1,38.56 v21.16,37.62 | v20.83,31.83 20.7,31.95 19.8,31.95 U1.78
  Bottom 0.152: v13.64,45.74 13.64,46.1 13.49,46.25 13.49,46.97 13.72,47.19 30.81,47.19 31.24,46.76 31.24,42.93 v30.84,43.05 | v21.16,37.62 20.7,37.16 20.7,36.7 21.11,36.29 21.11,35.7 20.78,35.36 20.78,31.88 v20.83,31.83
DQ1  (via drill 0.35)
  Top 0.152: U3.22 13.04,47.69 13.04,45.26 v12.63,44.85 | U2.32 34.13,40.62 30.91,43.84 23.67,43.84 23.62,43.79 v22.84,43.79 v22.84,43.8 | U1.72 22.76,35.09 23.09,35.42 23.09,35.86 22.76,36.19 v22.76,36.4
  Bottom 0.152: v22.76,36.4 22.76,43.72 v22.84,43.8 22.84,44.18 23.01,44.35 23.01,44.68 23.04,44.7 23.01,44.73 23.01,44.85 22.65,45.21 20.67,45.21 20.65,45.23 20.14,45.23 19.59,44.68 16.98,44.68 16.58,44.28 14.98,44.28 14.59,44.68 12.8,44.68 v12.63,44.85
DQ2  (via drill 0.35)
  Top 0.152: U3.23 12.61,45.97 v12.38,45.74 | U2.33 37.55,41.26 34.1,41.26 30.83,44.53 v24.08,44.53 | v23.37,37.13 23.37,36.01 23.39,35.99 23.39,34.66 U1.71
  Bottom 0.152: v23.37,37.13 23.6,37.36 23.6,43.81 24.08,44.3 v24.08,44.53 24.05,44.53 23.04,45.54 20.02,45.54 19.97,45.49 16.88,45.49 16.88,45.01 16.45,44.58 15.11,44.58 14.59,45.11 14.37,45.11 | 14.37,45.11 14.25,44.98 | v12.38,45.74 12.65,45.46 12.88,45.46 13.23,45.11 14.37,45.11
DQ3  (via drill 0.35)
  Top 0.152: U3.25 11.61,46.79 v11.88,46.52 | v31.95,44.27 34.59,41.62 U2.34 | v28.96,38.28 28.4,37.72 28.4,34.67 U1.61
  Bottom 0.152: v11.88,46.52 11.88,47.39 12.12,47.62 31.29,47.62 32.18,46.74 32.18,44.51 v31.95,44.27 31.95,42.31 29.03,39.39 29.03,38.35 v28.96,38.28
DQ4  (via drill 0.35)
  Top 0.152: U2.38 37.55,43.76 35.25,43.76 34.14,44.86 v33.72,44.86 | v11.14,45.97 11.11,46 U3.26 | U1.60 28.75,35.41 28.85,35.51 28.85,36.27 30.1,37.52 v33.38,37.52
  Bottom 0.152: v11.14,45.97 11.14,47.46 11.61,47.93 33.07,47.93 33.16,47.84 33.16,45.52 33.72,44.96 v33.72,44.86 33.72,37.86 v33.38,37.52
DQ5  (via drill 0.35)
  Top 0.152: U3.27 10.61,46.95 10.51,46.85 10.51,45.26 v10.54,45.24 | v33.77,45.77 34.07,45.47 34.07,45.37 35.31,44.12 U2.39 | U1.59 29.29,34.56 29.29,35.83 29.55,36.09 29.84,36.09 30.63,36.88 30.63,37.08 32.95,37.08 33.12,36.91 33.83,36.91 v34.28,37.36
  Bottom 0.152: v10.54,45.24 10.54,48 10.77,48.23 33.5,48.23 33.77,47.97 v33.77,45.77 34.07,45.47 34.07,45.37 34.32,45.11 34.32,44.61 34.28,44.57 v34.28,37.36
DQ6  (via drill 0.35)
  Top 0.152: U2.40 35.67,44.62 v34.67,45.62 | U3.28 10.11,46.96 10.19,46.88 10.19,46.38 9.58,45.77 v9.58,45.72 | U1.50 35.46,33.58 v35.46,35.08
  Bottom 0.152: v9.58,45.72 9.58,45.77 10.19,46.38 10.19,46.88 10.11,46.96 10.11,48.08 10.57,48.54 33.73,48.54 34.12,48.16 34.12,46.46 34.67,45.9 v34.67,45.62 34.98,45.32 34.98,38.33 35.46,37.85 v35.46,35.08
DQ7  (via drill 0.35)
  Top 0.152: U3.29 9.61,46.61 v9.58,46.58 | v35.71,45.44 36.03,45.12 U2.41 | U1.49 35.01,32.63 35.5,32.63 36.3,33.43 v36.3,35.53
  Bottom 0.152: v9.58,46.58 9.58,48.42 9.98,48.82 9.98,48.84 33.88,48.84 34.47,48.26 34.47,46.68 v35.71,45.44 35.76,45.39 35.76,41.73 36.3,41.2 v36.3,35.53
E  (via drill 0.35)
  Top 0.152: U1.64 26.7,34.47 26.7,33.66 26.67,33.63 26.39,33.63 25.35,32.59 25.35,32.31 25.15,32.1 25.15,31.6 25.35,31.4 25.35,28.45 25.02,28.12 23.88,28.12 v23.34,28.65 | J1.6 20.36,9.22 18.58,11.01 18.58,15.26 18.64,15.32 18.64,19.32 v18.3,19.66
  Bottom 0.152: v23.34,28.65 23.34,23.54 20.09,20.29 18.95,20.29 18.62,19.96 18.6,19.96 v18.3,19.66
EPA0  (via drill 0.35)
  Top 0.152: v46.27,23.8 44.82,23.8 IC1.1
  Bottom 0.152: 42.77,22.81 42.65,22.94 | JPA0.2 42.91,23.48 42.91,23.02 43.07,22.86 45.7,22.86 46.27,23.43 v46.27,23.8
EPA1  (via drill 0.35)
  Top 0.152: v46.27,25.09 44.79,25.09 IC1.2
  Bottom 0.152: JPA1.2 42.7,26.34 42.77,26.34 43.1,26.67 43.92,26.67 43.94,26.65 44.71,26.65 | 44.71,26.67 44.71,26.65 | v46.27,25.09 44.71,26.65
EPA2  (via drill 0.35)
  Top 0.152: v46.26,25.86 45.7,26.42 IC1.3
  Bottom 0.152: v46.26,25.86 46.26,25.88 45.14,27 43.05,27 42.8,27.25 JPA2.2
EPWP  (via drill 0.35)
  Top 0.152: v41.1,25.09 39.59,25.09 IC1.7
  Bottom 0.152: 42.63,29.4 JPWP.2 42.56,29.86 42.56,30.32 42.42,30.45 41.6,30.45 41.47,30.32 41.47,28.62 41.34,28.49 41.34,25.34 v41.1,25.09
EXTPROTSW  (via drill 0.35)
  Top 0.152: R8.1 5.2,37.26 v5.2,36.93 J2.12 | v28.4,31.65 28.4,31.55 27.58,30.73 27.58,24.37 26.22,23.01 26.22,20.95 26.75,20.41 U1.12 | v33.55,31.62 30.51,31.62 30.5,31.62 v30.15,31.62 | v43.49,34.47 43.43,34.42 S1.2 | v21.57,31.51 22.34,31.51 22.84,32.01 23.57,32.01 23.92,32.36 23.92,32.87 23.81,32.98 v23.81,33.41
  Bottom 0.152: v30.15,31.62 v30.14,31.62 28.42,31.62 v28.4,31.65 27.34,31.65 26.71,31.02 25.41,31.02 24.92,31.51 24.92,32.3 v23.81,33.41 | v33.55,31.62 40.64,31.62 v43.49,34.47 | v5.2,36.93 7.59,34.54 15.17,34.54 v20.09,39.47 21.33,38.22 21.41,38.22 21.76,37.87 21.76,37.37 21.41,37.02 21.41,31.67 v21.57,31.51
FPEJECT
  Top 0.152: R1.5 35.6,8.75 35.48,8.75 34.68,7.95 J3.1
FPPWR
  Top 0.152: J3.2 37.26,6.13 37.26,8.79 37.49,9.02 R1.2
GND
  pour Bottom: 0,49.66 46.99,49.66 46.99,0.13 0,0.13
  pour Top: 0,49.66 46.99,49.66 46.99,0.13 0,0.13
HDDACT  (via drill 0.35)
  Top 0.152: RN1.3 16.4,11.97 v17.6,10.77 | v21.95,10.82 30.38,10.82 v30.43,10.87 | v39.14,28.96 40.63,30.44 40.63,43.7 41.07,44.14 J4.2
  Bottom 0.152: v17.6,10.77 17.65,10.82 21.06,10.82 21.09,10.8 21.5,10.8 21.52,10.82 v21.95,10.82 | v39.14,28.96 39.42,28.68 39.42,25.54 39.37,25.49 39.37,24.8 39.42,24.75 39.42,19.86 35.43,15.87 35.41,15.87 34.88,15.34 34.88,15.32 v30.43,10.87
HDDLED  (via drill 0.35)
  Top 0.152: J2.9 v3.85,31.84 v3.83,31.85 | v13.43,22.28 13.4,22.25 RN3.6
  Bottom 0.152: v3.83,31.85 3.91,31.77 6.45,31.77 7.01,31.22 7.01,28.45 7.04,28.42 7.04,27.66 7.01,27.64 7.01,26.9 9.91,24 11.96,24 13.43,22.54 v13.43,22.28
K
  Top 0.152: J1.16 25.36,9.1 25.76,9.5 30.51,9.5 30.54,9.48 31.86,9.48 R2.4
LAD0  (via drill 0.35)
  Top 0.152: JP1.11 40.1,17.68 40.1,17.88 38.22,19.76 38.15,19.76 37.98,19.94 v37.39,19.94 | v36.93,23.62 36.93,23.68 36.34,24.28 36.34,24.36 35.78,24.93 34.85,24.93 U1.34
  Bottom 0.152: v37.39,19.94 36.93,20.4 v36.93,23.62
LAD1  (via drill 0.35)
  Top 0.152: v36.95,24.53 36.65,24.83 36.35,24.83 35.73,25.45 U1.35 | 43.83,13.34 JP1.10 44.45,14.33 42.9,15.88 42.9,16.29 42.32,16.87 41.91,16.87 v38.41,20.37
  Bottom 0.152: v38.41,20.37 37.92,20.85 37.49,20.85 37.35,20.99 37.35,23.18 37.49,23.32 37.49,23.99 v36.95,24.53
LAD2  (via drill 0.35)
  Top 0.152: v37.68,15.16 37.1,15.74 v37.1,19.02 | v36.6,25.44 36.3,25.74 36.27,25.74 36.06,25.95 U1.36
  Bottom 0.152: JP1.8 43.46,11.79 41.06,11.79 v37.68,15.16 | v37.1,19.02 36.6,19.52 36.6,23.09 36.33,23.37 36.33,23.87 36.34,23.88 36.34,24.78 36.6,25.04 v36.6,25.44
LAD3  (via drill 0.35)
  Top 0.152: U1.37 35.48,26.45 35.59,26.34 36.09,26.34 36.17,26.42 v36.57,26.42 | v36.4,18.44 36.4,15.36 v36.77,14.99
  Bottom 0.152: v36.57,26.42 36.57,26.34 36.4,26.17 36.4,26.09 36,25.69 36,25.18 36.04,25.14 36.04,24.01 36.02,24 36.02,23.24 36.3,22.96 36.3,19.4 36.4,19.29 v36.4,18.44 | v36.77,14.99 40.97,10.79 JP1.7
LANACT  (via drill 0.35)
  Top 0.152: J4.3 41.8,45.36 40.77,45.36 40.77,44.27 40.03,43.54 40.01,43.51 40.01,35.38 40.08,35.31 40.08,30.99 38.43,29.34 v38.43,28.47 | RN1.4 17.6,12.59 v17.6,12.04 | v30.28,11.86 30.26,11.85 30.26,11.43 26.96,11.43 26.66,11.13 26.22,11.13 25.92,11.43 22.02,11.43 v21.46,11.99
  Bottom 0.152: v38.43,28.47 39.04,27.86 39.04,19.91 35.3,16.18 35.29,16.18 34.57,15.46 34.57,15.45 34.44,15.32 34.34,15.32 31.22,12.19 31.01,12.19 30.77,11.95 30.36,11.95 v30.28,11.86 | v21.46,11.99 21.31,11.84 17.8,11.84 v17.6,12.04
LANLED  (via drill 0.35)
  Top 0.152: J2.10 v3.87,32.84 v3.86,32.84 | v14.34,22.25 14.34,21.49 RN3.5
  Bottom 0.152: v14.34,22.25 12.21,24.38 10.09,24.38 7.31,27.16 7.31,27.51 7.34,27.54 7.34,28.55 7.31,28.57 7.31,32.51 6.98,32.84 v3.86,32.84
LCLK  (via drill 0.35)
  Top 0.152: v36.12,27.23 35.87,26.97 35.16,26.97 35.14,26.95 U1.38 | v35.76,17.55 35.76,14.96 v35.87,14.86 | v38.62,8.1 38.62,6.47 JP1.1
  Bottom 0.152: v35.76,17.55 35.84,17.63 35.84,18.14 35.79,18.19 35.79,18.69 35.84,18.74 35.84,22.99 35.72,23.11 35.72,24.12 35.73,24.14 35.73,25.02 35.69,25.06 35.69,25.81 35.81,25.94 35.81,26.92 v36.12,27.23 | v35.87,14.86 35.87,10.86 v38.62,8.1
MNFLCE#  (via drill 0.35)
  Top 0.152: U2.11 18.43,43.49 19.14,43.49 19.58,43.05 19.58,41.5 v20.27,40.82 | v29.42,29.97 29.42,29.54 29.29,29.41 29.29,24.23 27.74,22.68 27.74,21.64 29.18,20.19 29.18,19.44 U1.17
  Bottom 0.152: v20.27,40.82 21.69,40.82 22.17,40.34 22.17,38.32 22.37,38.12 22.37,36.87 22.15,36.65 22.15,36.15 22.17,36.12 22.17,36.01 22.02,35.86 22.02,32.94 25.27,29.69 25.55,29.97 v29.42,29.97
N$1
  Top 0.254: LED2.A 2.53,16.51 R9.1
N$2
  Top 0.254: R3.2 16.88,15.73 16.88,15.54 17.2,15.22 RN1.5
N$3
  Top 0.254: RN1.6 16.38,14.26 16.43,14.31 16.43,15.11 16.01,15.11 15.29,15.83 15.29,16.32 16.44,17.47 16.44,17.66 R3.5
N$4
  Top 0.254: RN2.4 RN2.3 RN2.2 RN2.1 9.01,20.32 8,20.32 7.87,20.19 6.99,20.19 R7.2 9.14,19.3 11.73,16.71 11.73,15.88 12.53,15.88 R4.1 12.88,16.22 12.88,16.41 13.04,16.57 13.17,16.57 13.96,17.36 R4.4 | R3.1 16.23,16.17 16.23,16.36 16.39,16.52 17.53,16.52 17.53,17.67 R3.4
N$5
  Top 0.152: LED1.A R10.2
N$6  (via drill 0.35)
  Top 0.254: R4.5 13.31,18.25 v12.8,18.75 | v15.04,15.1 15.6,14.53 RN1.7
  Bottom 0.254: v12.8,18.75 13.05,18.5 13.19,18.5 15.04,16.66 v15.04,15.1
N$56
  Top 0.152: R1.3 37.17,9.67 36.39,8.89 36.39,8.77 36.25,8.64 36.13,8.64 R1.6
N$59  (via drill 0.35)
  Top 0.152: U1.39 33.94,27.45 33.93,27.46 33.35,26.87 v33.35,25.98 | v34.39,19.84 34.39,15.8 32.17,13.58 R5.1
  Top 0.508: R5.1 32.7,12.83 32.91,12.62 32.91,12.16 33.15,11.92 33.61,11.92 R1.4
  Bottom 0.152: v33.35,25.98 33.35,23.93 34.44,22.83 34.44,19.89 v34.39,19.84
N$61
  Top 0.152: R1.1 38.06,8.64 38.18,8.64 39.09,9.54 39.09,11.28 37.68,12.69 R6.2
N$62
  Top 0.152: R2.2 33.72,9.29 33.6,9.29 33.46,9.42 33.46,10.45 31.82,12.1 31.52,12.1 31.39,12.23 31.39,12.86 30.92,12.86 30.61,13.17 30.61,13.61 30.84,13.83 30.84,13.89 31.22,14.28 31.22,17.39 31.44,17.61 31.44,18.49 31.75,18.8 U1.22
N$63
  Top 0.152: R2.5 32.32,9.29 32.44,9.29 32.58,9.42 32.58,10.91 31.69,11.79 31.4,11.79 31.09,12.11 31.09,12.26 30.3,13.04 30.3,13.73 30.53,13.96 30.53,14.02 30.91,14.4 30.91,17.51 31.14,17.74 31.14,18.18 30.89,18.43 30.89,19.24 U1.20
N$71
  Top 0.254: R4.2 13.53,15.78 13.53,15.59 14.8,14.32
N$72
  Top 0.254: RN3.4 14.21,19.69 15.29,18.6 15.6,18.6 15.99,18.22 15.99,17.91 R3.6
N$73  (via drill 0.35)
  Top 0.254: RN3.3 13.67,19.83 13.67,19.64 15.12,18.2 15.31,18.2 15.58,17.93 15.35,17.93 v15.33,17.95 | v18.03,15.57 17.69,15.57 R3.3
  Bottom 0.254: v15.33,17.95 17.71,15.57 v18.03,15.57
N$74
  Top 0.254: RN3.2 12.88,19.83 12.88,19.66 14.03,18.5 14.23,18.5 14.61,18.13 14.61,16.13 14.09,16.13 R4.3
N$75
  Top 0.152: RN3.1 11.8,18.79 R4.6
N$78  (via drill 0.35)
  Top 0.152: RN1.1 v14.8,11.54 v14.81,11.53 | v35.05,18.97 35.1,18.97 35.76,19.63 35.76,20.03 36.27,20.54 36.27,22.15 35.64,22.78 35.64,23.13 35.46,23.31 35.46,23.47 35.44,23.45 U1.31
  Bottom 0.152: v14.81,11.53 15.37,11.53 15.47,11.43 20.88,11.43 21.21,11.1 21.37,11.1 22.43,12.16 22.43,12.82 22.74,13.13 23.4,13.13 23.91,13.64 24.45,13.64 24.62,13.82 28.22,13.82 28.45,13.59 28.92,13.59 29.37,14.05 31.88,14.05 35.05,17.22 v35.05,18.97
N$79  (via drill 0.35)
  Top 0.152: U1.30 33.9,22.95 33.58,22.63 v33.6,22.61 | v23.72,15.39 21.11,12.78 v20.6,12.78 | v15.65,12.12 15.6,12.16 RN1.2
  Bottom 0.152: v23.72,15.39 26.31,15.39 26.8,15.88 29.36,15.88 29.82,16.34 30.34,16.34 30.83,16.82 30.83,17 31.44,17.61 31.44,17.95 32.98,19.49 32.99,19.49 32.99,22.17 33.43,22.61 v33.6,22.61 | v20.6,12.78 16.31,12.78 v15.65,12.12
N$87
  Top 0.152: R7.1 4.41,23.05 J2.1
OE#  (via drill 0.35)
  Top 0.152: U3.32 7.68,47.77 v7.29,48.16 | U2.43 37.65,46.15 35.87,46.15 v35.18,46.84 32.92,46.84 32.8,46.72 29.47,46.72 v29.29,46.53 | U1.15 28.25,20.19 28.2,20.24 28.07,20.24 26.97,21.34 26.97,22.88 28.22,24.13 28.2,30.11 29.31,31.22 29.31,32.31 v29.54,32.54
  Bottom 0.152: v7.29,48.16 8.28,49.15 34.01,49.15 35.18,47.98 v35.18,46.84 | v29.29,46.53 29.29,42.93 26.95,40.59 26.95,34.92 29.34,32.54 v29.54,32.54
REDLED  (via drill 0.35)
  Top 0.152: J2.7 3.89,29.84 v3.86,29.87 | RN3.8 11.79,21.37 11.79,22.05 v11.56,22.28
  Bottom 0.152: v3.86,29.87 5.89,29.87 6.4,29.36 6.4,28.19 6.43,28.17 6.43,27.91 6.4,27.89 6.4,25.96 8.99,23.37 11.28,23.37 11.56,23.09 v11.56,22.28
RS  (via drill 0.35)
  Top 0.152: U1.44 34.65,29.77 34.16,29.77 33.75,29.36 v33.71,29.36 | v30,17.17 30,14.45 29.23,13.69 29.02,13.69 28.7,13.38 28.7,13.16 v28.19,12.65 | v25.82,6.77 19.67,6.77 19.61,6.71 19.36,6.95 J1.4
  Bottom 0.152: v33.71,29.36 32.97,28.62 32.97,28.03 31.37,26.43 31.37,23.71 31.54,23.53 31.54,21.02 31.32,20.79 31.32,20.55 29.67,18.9 30,18.57 v30,17.17 | v28.19,12.65 28.19,9.2 25.82,6.82 v25.82,6.77
RW  (via drill 0.35)
  Top 0.152: U1.65 26.44,34.71 26.44,35.2 26.93,35.69 v27.58,35.69 | v20.34,3.68 20.34,2.37 J1.5 | v22.96,12.6 23.19,12.82 23.19,12.84 23.5,13.15 23.52,13.15 23.93,13.56 23.93,14.85 24.25,15.17 24.25,15.61 24.18,15.68 v24.18,16.51
  Bottom 0.152: v27.58,35.69 29.52,33.76 30.43,33.76 30.5,33.68 30.5,32.01 30.73,31.79 30.73,30.51 30.53,30.31 30.53,29.04 30.22,28.73 29.62,28.73 28.93,28.04 28.93,22.7 29.11,22.52 29.11,22.08 28.79,21.77 28.66,21.77 26.37,19.48 26.37,18.92 26.06,18.61 26.06,18.09 25.9,17.94 25.9,17.88 25.24,17.22 24.77,17.22 24.41,16.86 24.41,16.73 v24.18,16.51 | v22.96,12.6 22.96,10.69 20.32,8.05 20.32,3.71 v20.34,3.68
SCL
  Top 0.152: JP1.13 41.91,18.77 42.79,19.65 42.4,20.04 42.9,20.54 42.9,21.36 42.16,22.1 42.16,22.43 42.1,22.49 42.1,24.84 40.53,26.42 IC1.6
SDA
  Top 0.152: 40.95,27.69 IC1.5 | JP1.14 42.83,20.04 43.21,20.42 43.21,21.49 42.47,22.23 42.47,26.16
SWBANK1  (via drill 0.35)
  Top 0.152: J2.6 5.16,28.88 v3.86,28.88 | RN2.5 7.71,23.48 v7.62,23.57 | U1.23 32.07,19.56 32.07,20.53 v32.16,20.44 | v32.16,20.45 v32.16,20.44 | 32.19,20.41 v32.16,20.44
  Bottom 0.152: v3.86,28.88 5.28,28.88 6.12,28.04 6.04,27.96 6.04,25.83 7.62,24.26 v7.62,23.57 12.2,19 12.2,19.01 12.55,19.36 13.05,19.36 15.39,17.02 15.39,16.03 15.62,15.8 16.95,15.8 17.78,14.96 18.29,14.96 18.64,15.32 18.64,15.8 20.48,15.8 20.75,15.52 21.26,15.52 21.66,15.93 25.89,15.93 26.17,16.2 29.21,16.2 29.64,16.64 30.22,16.64 30.53,16.95 30.53,17.13 31.14,17.74 31.14,18.13 32.16,19.15 v32.16,20.45
SWBANK2  (via drill 0.35)
  Top 0.152: J2.5 v3.84,27.84 v3.83,27.84 | RN2.6 7.63,22.68 v7.62,22.66 | U1.27 34.82,21.46 33.96,21.46 v33.63,21.79
  Bottom 0.152: v3.83,27.84 3.89,27.79 5.13,27.79 5.71,27.2 5.71,25.65 7.01,24.35 7.01,23.32 7.14,23.2 7.14,23.01 7.49,22.66 v7.62,22.66 14.43,15.85 14.43,14.84 14.79,14.49 15.29,14.49 15.64,14.84 15.64,15.49 16.82,15.49 17.66,14.66 18.41,14.66 19.25,15.49 20.35,15.49 20.63,15.22 21.38,15.22 21.66,15.49 22.87,15.49 23.5,14.86 23.94,14.86 24.17,15.09 26.44,15.09 26.85,15.49 27.23,15.49 27.3,15.57 29.54,15.57 30,16.03 30.47,16.03 31.14,16.7 31.14,16.88 31.75,17.48 31.75,17.78 33.3,19.33 33.3,21.46 v33.63,21.79
SWBANK3  (via drill 0.35)
  Top 0.152: J2.4 3.83,26.84 v3.81,26.82 | RN2.7 7.72,21.88 v7.6,21.75 | U1.28 35.61,21.95 35.66,21.89 35.64,21.87 35.64,20.77 35.5,20.63 35.44,20.63 35.29,20.48 v33.86,20.48
  Bottom 0.152: v3.81,26.82 4.75,26.82 5.41,26.16 5.41,23.94 v7.6,21.75 14.12,15.22 14.12,14.72 14.66,14.18 15.41,14.18 16.3,15.07 16.82,15.07 17.53,14.35 18.54,14.35 19.37,15.19 20.22,15.19 20.5,14.91 21.51,14.91 21.79,15.19 22.64,15.19 23.35,14.48 23.45,14.48 23.53,14.56 24.07,14.56 24.29,14.78 26.57,14.78 26.97,15.19 29.62,15.19 30.15,15.72 30.6,15.72 31.44,16.57 31.44,16.75 32.05,17.36 32.05,17.62 33.86,19.43 v33.86,20.48
SWBANK4  (via drill 0.35)
  Top 0.152: J2.3 5.17,25.81 v3.86,25.81 | RN2.8 7.83,21.08 v7.6,20.84 | U1.29 34.88,22.4 35.59,22.4 35.97,22.02 35.97,20.66 35.63,20.33 35.59,20.33 35.23,19.96 v35.23,19.89
  Bottom 0.152: v3.86,25.81 4.7,25.81 5.11,25.4 5.11,23.19 7.45,20.84 v7.6,20.84 13.82,14.62 13.82,14.59 14.53,13.88 18.49,13.88 19.5,14.88 20.1,14.88 20.38,14.61 21.64,14.61 21.91,14.88 22.51,14.88 23.22,14.18 23.58,14.18 23.66,14.25 24.2,14.25 24.42,14.48 26.69,14.48 27.1,14.88 30.21,14.88 35.19,19.86 35.2,19.86 v35.23,19.89
TCK  (via drill 0.35)
  Top 0.152: U1.24 32.57,19.19 32.57,18.7 32.44,18.57 31.95,18.57 31.75,18.37 31.75,17.48 31.52,17.26 31.52,14.15 31.14,13.77 v31.14,13.39 | v28.12,8.25 27.92,8.06 J1.20
  Bottom 0.152: v31.14,13.39 31.14,12.75 30.78,12.39 30.06,12.39 29.75,12.08 29.75,11.64 29.77,11.62 29.77,8.51 29.52,8.25 v28.12,8.25
TDI  (via drill 0.35)
  Top 0.152: J1.18 26.36,6.24 v26.31,6.2
TDO  (via drill 0.35)
  Top 0.152: v22.55,35.64 22.25,35.33 22.07,35.33 21.75,35.02 U1.74 | v26.54,31.6 26.54,24.94 v26.44,24.84 | v28.57,22.3 29.49,21.39 v32.16,21.39 | v30.61,17.96 30.61,14.53 v29.23,13.16 | v29.18,8.97 29.18,7.42 26.36,4.59 J1.17
  Bottom 0.152: v22.55,35.64 22.55,35.59 25.22,32.92 25.22,31.63 25.54,31.32 25.97,31.32 26.25,31.6 v26.54,31.6 | v26.44,24.84 28.57,22.71 v28.57,22.3 | v32.16,21.39 32.16,21.2 31.63,20.67 31.63,19.81 30.3,18.49 30.3,18.26 v30.61,17.96 | v29.23,13.16 29.23,9.02 v29.18,8.97
TMS  (via drill 0.35)
  Top 0.152: U1.52 32.75,35.17 32.82,35.23 32.82,35.74 32.46,36.09 32.33,36.09 v32.03,36.39 | v27.84,16.76 27.84,15.79 27.28,15.24 26.96,15.24 26.44,14.72 26.44,13.19 | 26.44,13.19 26.42,13.16 | 26.44,13.19 v26.44,11.66 | v26.36,10.11 30.66,10.11 v30.76,10.01 | v27.41,3.73 27.41,2.4 J1.19
  Bottom 0.152: v32.03,36.39 32.33,36.09 32.46,36.09 32.82,35.74 32.82,33.37 32.84,33.35 32.84,32.84 32.49,32.49 32.49,31.31 32.41,31.23 32.41,31.06 32.56,30.91 32.56,29.64 32.05,29.13 32.05,28.41 30.85,27.21 30.45,27.21 30.45,23.33 30.63,23.15 30.63,21.45 29.43,20.25 29.29,20.25 28.12,19.07 28.12,18.23 27.89,18 27.89,17.56 28.14,17.31 28.14,17.07 v27.84,16.76 | v26.44,11.66 26.44,10.19 v26.36,10.11 | v30.76,10.01 30.76,6.15 29.41,4.8 28.17,4.8 27.41,4.04 v27.41,3.73
VO
  Top 0.152: R11.1 11.37,7.79 16.15,3 16.66,3.5 17.21,3.5 17.44,3.73 19.33,3.73 19.33,2.39 J1.3 | R12.1 8.35,14.96 R11.2
WE#  (via drill 0.35)
  Top 0.152: U2.44 36.87,46.62 35.64,47.85 33.08,47.85 v32.55,47.32 | 28.78,19.4 U1.16 | U3.7 11.11,29.83 v11.23,29.95 | v27.33,14.35 28.65,15.67 28.65,15.9 28.95,16.2 28.95,18 28.78,18.17 28.78,19.4 | 28.78,19.4 28.78,20.12 27.36,21.54 27.36,22.76 28.57,23.98 28.57,28.4 28.78,28.6 28.78,30.25 29.62,31.09 29.62,31.84 30.29,32.51 32.53,32.51 32.78,32.77 33.19,32.77 33.35,32.92 33.66,32.92 34.01,33.27 34.01,33.68 v34.6,34.27
  Bottom 0.152: v11.23,29.95 7.6,33.58 3.73,33.58 3.73,33.57 3.2,33.04 3.2,23.97 13.6,13.57 23.41,13.57 23.78,13.95 24.32,13.95 24.55,14.17 27.15,14.17 v27.33,14.35 | v32.55,47.32 32.55,36.73 32.64,36.65 32.64,36.35 33.12,35.86 33.12,35.74 v34.6,34.27

## Text on the board
bPlace: VCC | GND